# Altium PCB CAN_PDM_Pcb.PcbDoc (part 3 of 3)
Units mm, origin at the board's own origin, x right, y up, seen from the top; angles counter-clockwise.
Board outline 120 x 90 mm, 4 copper layers (Top Layer, Int1 (GND-PWR), Int2 (PWR-3V3), Bottom Layer), stack 1.51 mm thick; 313 components, 200 nets, 938 pads, 544 vias.
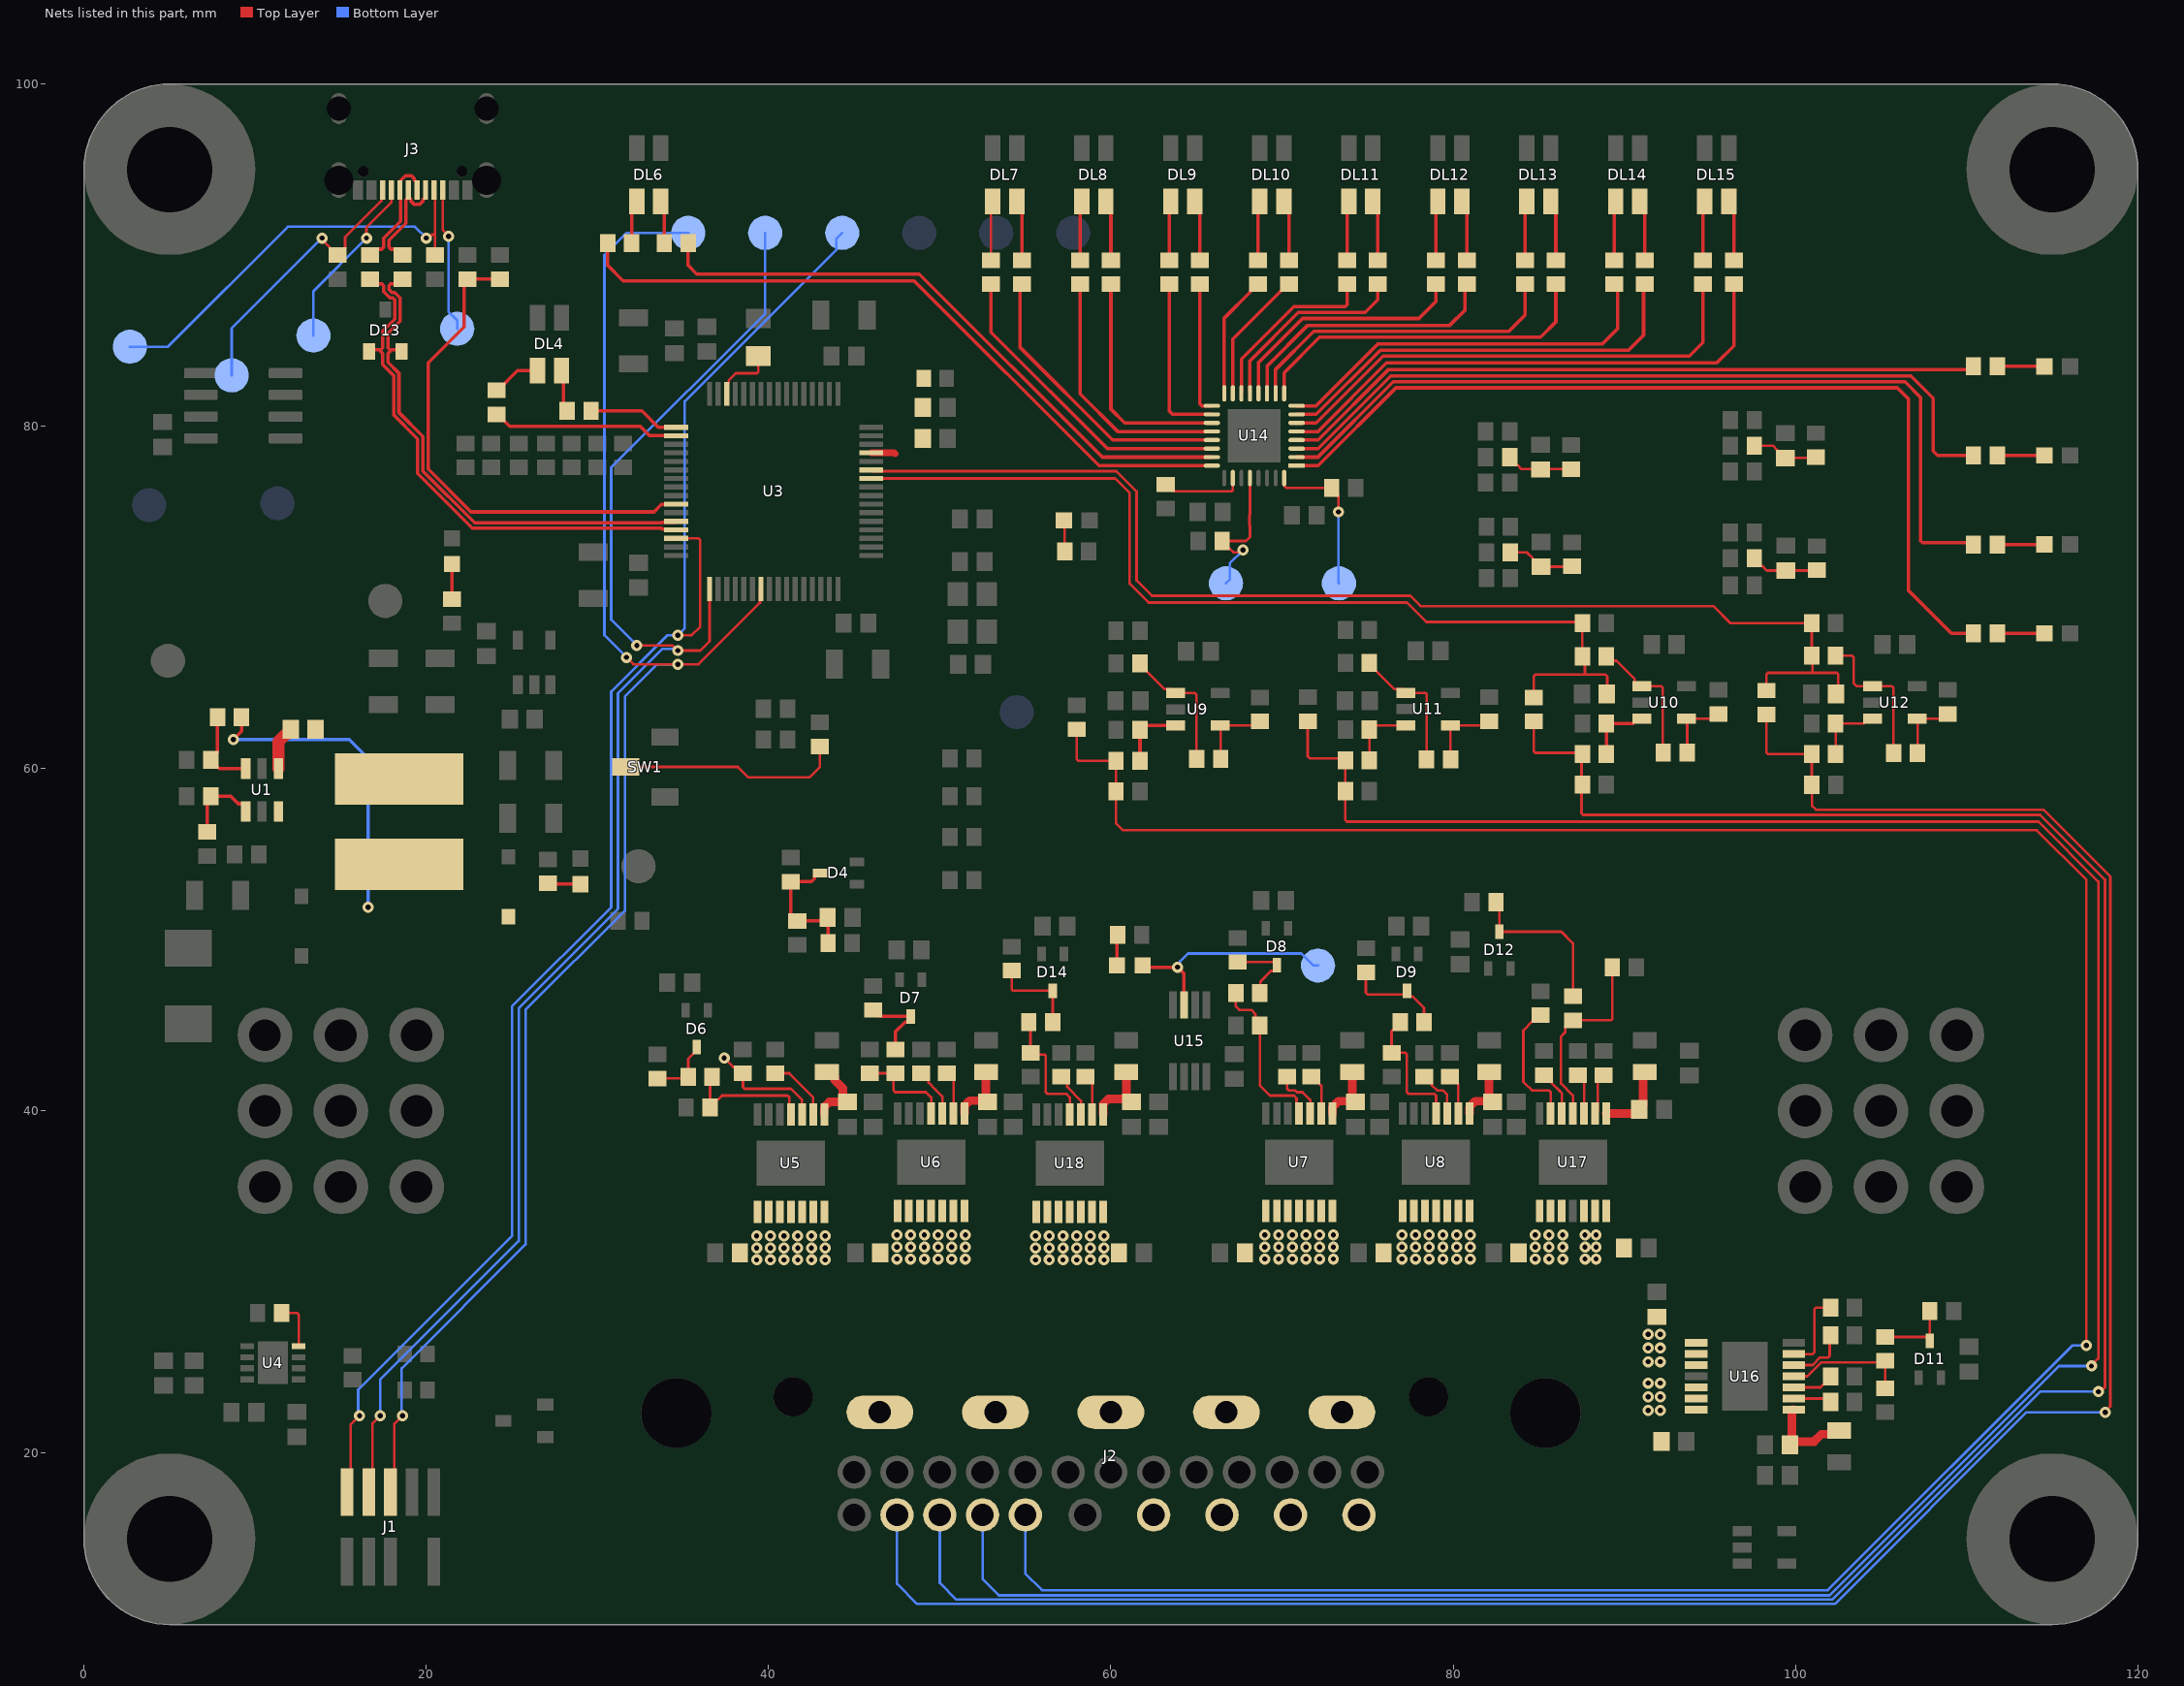
[diagram p5: the nets of this part, all layers, seen from the top]

## Via types
v1: diameter 0.65, hole 0.3, Top Layer to Bottom Layer, 543 vias
v2: diameter 0.63, hole 0.3, Top Layer to Bottom Layer, 1 vias

## Nets (pads, with @x,y where several pads share a name; then routed paths per layer and width w, separated by ;. In a path a pad name is that pad's centre, name@x,y a point inside that pad or via, vN(x,y) a via of type N, cw(c..) or ccw(c..) an arc to the next point about the centre after c; other vN are vias at no path point) (continued)
MCU_SENS3: C46.1 R51.1 R55.2 R61.2 U3.10 | length 57.9
  Top Layer w0.15: U3.10@46,76.95 60.25,76.95 61.1,76.1 61.1,70.8 62.2,69.7 77.3,69.7 78.428,68.572 87.475,68.572 R51.1@87.55,68.497 R55.2@87.55,66.561 87.7,66.411 87.7,65.5 ; R61.2@84.712,64.161 84.712,65.412 84.8,65.5 87.7,65.5 ; C46.1@88.975,64.361 89,64.385 89,65.4 88.9,65.5 87.7,65.5
MCU_SENS4: C50.1 R67.1 R71.2 R77.2 U3.11 | length 71
  Top Layer w0.15: U3.11@46,77.45 46.075,77.375 60.325,77.375 61.5,76.2 61.5,71 62.4,70.1 77.5,70.1 78.1,69.5 95.2,69.5 96.2,68.5 R67.1@100.95,68.5 R71.2@100.95,66.6 101,66.55 101,65.6 ; R77.2@98.312,64.561 98.312,65.512 98.4,65.6 101,65.6 ; C50.1@102.375,64.361 102.5,64.486 102.5,65.512 102.412,65.6 101,65.6
MCU_SWCLK: J1.4 TP3.1 U3.49 | length 93.4
  Top Layer w0.15: J1.4@16.63,17.735 16.857,17.962 16.857,21.757 v1(17.3,22.2) ; v1(32.3,67.2) 34.362,67.2 34.662,66.9 v1(34.7,66.9) 36,66.9 36.55,67.45 U3.49@36.55,70.5
  Bottom Layer w0.15: v1(17.3,22.2) 17.3,24.3 25.4,32.4 25.4,46 31.2,51.8 31.2,64.4 33.8,67 34.362,67 34.366,66.996 34.604,66.996 v1(34.7,66.9) ; v1(32.3,67.2) 30.8,68.7 30.8,77.593 39.8,86.593 TP3.1@39.8,91.3
MCU_SWDIO: J1.2 TP2.1 U3.46 | length 94
  Top Layer w0.15: J1.2@15.36,17.735 15.587,17.962 15.587,21.687 v1(16.1,22.2) ; U3.46@34.6,73.45 35.912,73.45 36,73.362 36,68.3 35.5,67.8 v1(34.7,67.8)
  Bottom Layer w0.15: v1(16.1,22.2) 16.02,22.28 16.02,23.72 25,32.7 25,46.1 30.8,51.9 30.8,64.5 34.1,67.8 v1(34.7,67.8) 35.1,68.2 35.1,81.454 43.946,90.3 43.946,90.946 TP2.1@44.3,91.3
MCU_SWO: J1.6 TP4.1 U3.55 | length 95.8
  Top Layer w0.15: J1.6@17.9,17.735 18.127,17.962 18.127,21.727 v1(18.6,22.2) ; v1(31.7,66.5) 32.1,66.1 v1(34.7,66.1) 35.9,66.1 39.491,69.691 39.491,70.441 U3.55@39.55,70.5
  Bottom Layer w0.15: v1(18.6,22.2) 18.56,22.24 18.56,24.96 25.8,32.2 25.8,45.9 31.6,51.7 31.6,64.2 33.5,66.1 v1(34.7,66.1) ; v1(31.7,66.5) 30.4,67.8 30.4,90 31.7,91.3 TP4.1@35.3,91.3
MCU_USB_VBUS: R148.1 R149.2 U3.42 | length 29.7
  Top Layer w0.2: R149.2@24.3,88.6 R148.1@22.4,88.6 22.2,88.4 22.2,85.8 20.1,83.7 20.1,77.5 22.6,75 33.3,75 33.738,75.438 34.588,75.438 U3.42@34.6,75.45
MCU_USBD_N: D13.2 R147.1 U3.44 | length 30.1
  Top Layer w0.2: 17.872,84.375 17.755,84.258 17.755,83.741 18.395,83.101 18.395,80.805 19.8,79.4 19.8,77.376 22.821,74.355 33.731,74.355 33.776,74.4 34.55,74.4 U3.44@34.6,74.45 ; D13.2@18.55,84.375 18.461,84.464 17.872,84.464 17.755,84.581 17.755,85.434 18.46,86.139 18.46,87.511 18.161,87.81 17.991,87.81 17.805,87.996 17.805,88.22 17.922,88.337 18.337,88.337 R147.1@18.6,88.6
MCU_USBD_P: D13.1 R146.1 U3.45 | length 30.6
  Top Layer w0.2: D13.1@16.65,84.375 16.739,84.464 17.328,84.464 17.445,84.581 17.445,85.562 18.15,86.267 18.15,87.383 18.033,87.5 17.862,87.5 17.495,87.867 17.495,88.22 17.378,88.337 16.963,88.337 R146.1@16.7,88.6 ; 17.328,84.375 17.445,84.258 17.445,83.613 18.085,82.973 18.085,80.677 19.49,79.272 19.49,77.247 22.692,74.045 33.731,74.045 33.776,74 34.55,74 U3.45@34.6,73.95
NetC2_1: C2.1 U1.1 | length 2.6
  Top Layer w0.7: U1.1@11.35,60 11.35,61.575 11.775,62 11.85,62 12.075,62.225 C2.1@12.075,62.3
NetC2_2: C2.2 L1.1 U1.6
NetC22_1: C22.1 U3.30 | length 3.7
  Top Layer w0.15: U3.30@37.55,81.9 37.55,82.45 37.675,82.575 37.675,82.693 38.082,83.1 39.312,83.1 39.4,83.188 C22.1@39.4,84.1
NetC24_1: C24.1 D4.C R10.1 R11.1 R12.2 | length 7.8
  Top Layer w0.2: D4.C@43,53.9 42.825,53.9 42.675,53.75 42.675,53.575 42.5,53.4 R11.1@41.3,53.4 41.3,51.45 41.65,51.1 R10.1@41.675,51.1 43.25,51.1 C24.1@43.45,51.3 43.475,51.275 R12.2@43.475,49.8
NetC29_2: C29.2 R20.1 U5.1 | length 4.3
  Top Layer w0.5: U5.1@43.25,39.8 43.25,40.232 43.543,40.525 C29.2@44.557,40.525 ; R20.1@43.4,42.275 43.625,42.275 43.85,42.05 43.85,41.825 44.332,41.343 44.332,40.75 C29.2@44.557,40.525 ; C29.2@44.6,40.525 C29.2@44.557,40.525
NetC33_2: C33.2 R26.1 U6.1 | length 3.6
  Top Layer w0.5: U6.1@51.45,39.85 51.45,40.307 51.743,40.6 C33.2@52.725,40.6 ; R26.1@52.7,42.275 52.7,40.625 C33.2@52.725,40.6 ; C33.2@52.8,40.525 C33.2@52.725,40.6
NetC37_2: C37.2 R34.1 U7.1 | length 3.7
  Top Layer w0.5: U7.1@72.95,39.85 72.95,40.23 73.293,40.573 C37.2@74.252,40.573 ; R34.1@74.1,42.275 74.1,40.725 C37.2@74.252,40.573 ; C37.2@74.3,40.525 C37.2@74.252,40.573
NetC41_2: C41.2 R40.1 U8.1 | length 3.7
  Top Layer w0.5: U8.1@80.95,39.85 80.95,40.23 81.293,40.573 C41.2@82.252,40.573 ; R40.1@82.1,42.275 82.1,40.725 C41.2@82.252,40.573 ; C41.2@82.3,40.525 C41.2@82.252,40.573
NetC53_1: C53.1 R80.2 R81.1 | length 3.9
  Top Layer w0.15: R81.1@83.3,78.2 83.3,78.125 83.675,77.75 83.75,77.75 84,77.5 R80.2@86.9,77.5
NetC54_1: C54.1 R82.2 R83.1 | length 4
  Top Layer w0.15: R83.1@97.6,78.875 98.675,78.875 98.925,78.625 98.925,78.55 99.325,78.15 C54.1@99.4,78.15 101.15,78.15 R82.2@101.2,78.2
NetC55_1: C55.1 R88.2 R89.1 | length 4
  Top Layer w0.15: R89.1@83.339,72.625 84.314,72.625 84.664,72.275 84.664,72.2 85.064,71.8 C55.1@85.139,71.8 86.914,71.8 R88.2@86.939,71.825
NetC56_1: C56.1 R90.2 R91.1 | length 4
  Top Layer w0.15: R91.1@97.6,72.3 97.6,72.225 97.975,71.85 98.05,71.85 98.325,71.575 C56.1@99.439,71.575 101.214,71.575 R90.2@101.239,71.6
NetC61_2: C61.2 R105.1 U16.1 | length 5.2
  Top Layer w0.5: C61.2@99.675,20.5 99.675,20.575 C61.2@99.788,20.687 ; U16.1@99.9,22.55 99.813,22.55 99.788,22.525 C61.2@99.788,20.687 ; R105.1@102.55,21.325 102.345,21.12 101.52,21.12 101.088,20.687 C61.2@99.788,20.687
NetC66_2: C66.2 R116.1 U17.1 | length 4
  Top Layer w0.5: U17.1@88.95,39.85 C66.2@90.65,39.85 ; C66.2@90.875,40.1 91.1,40.325 91.1,42.175 R116.1@91.2,42.275
NetC71_2: C71.2 R153.1 U18.1 | length 4
  Top Layer w0.5: U18.1@59.55,39.8 59.55,40.407 59.843,40.7 C71.2@60.95,40.7 ; R153.1@60.9,42.275 60.9,40.75 C71.2@60.95,40.7 ; C71.2@61.2,40.525 61.125,40.525 C71.2@60.95,40.7
NetD2_A: D2.A L1.2 R1.2 | length 18.5
  Top Layer w0.2: v1(8.725,61.706) 9.2,62.181 R1.2@9.2,63
  Bottom Layer w0.2: v1(8.725,61.706) 8.732,61.698 15.502,61.698 16.6,60.6 v1(16.6,51.9)
NetD6_C: D6.C R23.2 R24.1 | length 3.8
  Top Layer w0.15: R23.2@33.5,41.9 35.2,41.9 R24.1@35.3,42 35.3,43.05 35.8,43.55 D6.C@35.8,43.725
NetD7_C: D7.C R29.2 R30.1 | length 4.8
  Top Layer w0.2: R29.2@46.1,45.9 46.45,45.55 46.617,45.55 46.642,45.525 D7.C@48.3,45.525 48.3,45.35 48.15,45.2 47.975,45.2 47.4,44.625 R30.1@47.4,43.6
NetD8_C: D8.C R37.2 R38.1 | length 4.5
  Top Layer w0.15: R37.2@67.4,48.7 69.525,48.7 D8.C@69.7,48.525 69.7,48.353 69.525,48.178 69.353,48.178 68.737,47.562 68.737,46.937 R38.1@68.7,46.9
NetD9_C: D9.C R43.2 R44.1 | length 6
  Top Layer w0.15: R43.2@74.9,48.1 74.9,46.917 75.017,46.8 77.15,46.8 D9.C@77.3,46.95 ; D9.C@77.3,47.025 D9.C@77.3,46.95 ; R44.1@78.3,45.2 78.3,46.025 77.625,46.7 77.45,46.7 77.3,46.85 D9.C@77.3,46.95
NetD11_C: D11.C R110.2 R111.1 | length 4.4
  Top Layer w0.15: R111.1@105.25,26.8 107.675,26.8 D11.C@107.85,26.625 ; D11.C@107.85,26.575 D11.C@107.85,26.625 ; R110.2@107.85,28.3 D11.C@107.85,26.625
NetD12_C: D12.C R121.2 R122.1 | length 9.5
  Top Layer w0.15: R121.2@82.5,52.2 82.7,52 D12.C@82.7,50.475 86.325,50.475 87,49.8 R122.1@87,46.7
NetD14_C: D14.C R156.2 R157.1 | length 5.3
  Top Layer w0.15: R156.2@54.2,48.2 54.2,47.113 54.288,47.025 D14.C@56.6,47.025 R157.1@56.6,45.2
NetDL1_A: DL1.A R2.1 | length 1.9
  Top Layer w0.2: R2.1@27.1,53.3 27.15,53.25 DL1.A@29,53.25
NetDL2_A: DL2.A R6.1 | length 2.1
  Top Layer w0.2: R6.1@21.5,69.9 DL2.A@21.5,71.95
NetDL3_A: DL3.A R8.1 | length 1.8
  Top Layer w0.15: DL3.A@57.25,74.5 57.3,74.45 R8.1@57.3,72.7
NetDL4_A1: DL4.A1 R17.1 | length 1.9
  Top Layer w0.2: DL4.A1@27.9,83.25 28,83.15 R17.1@28,81.4
NetDL4_A2: DL4.A2 R16.1 | length 2.9
  Top Layer w0.2: R16.1@24.1,82.1 24.175,82.1 25.325,83.25 DL4.A2@26.5,83.25
NetDL5_A: DL5.A R99.1 | length 1.8
  Top Layer w0.2: DL5.A@60.35,48.5 60.35,50.25 R99.1@60.4,50.3
NetDL5_C: DL5.C TP16.1 U15.3 | length 13.4
  Top Layer w0.2: DL5.C@61.85,48.5 61.95,48.4 v1(63.9,48.4) 64.275,48.025 U15.3@64.275,46.2
  Bottom Layer w0.15: v1(63.9,48.4) 63.9,48.522 64.042,48.664 64.042,48.742 64.5,49.2 71.127,49.2 71.827,48.5 TP16.1@72.1,48.5
NetDL6_A1: DL6.A1 R101.1 | length 2.5
  Top Layer w0.2: DL6.A1@33.7,93.15 33.9,92.95 R101.1@33.9,90.7
NetDL6_A2: DL6.A2 R100.1 | length 2.6
  Top Layer w0.2: R100.1@32,90.7 32,92.85 DL6.A2@32.3,93.15
NetDL7_A1: DL7.A1 R125.1 | length 3.6
  Top Layer w0.2: DL7.A1@54.5,93.15 54.8,92.85 R125.1@54.8,89.7
NetDL7_A2: DL7.A2 R124.1 | length 3.5
  Top Layer w0.15: R124.1@53,89.7 53,93.05 DL7.A2@53.1,93.15
NetDL8_A1: DL8.A1 R127.1 | length 3.6
  Top Layer w0.2: DL8.A1@59.7,93.15 60,92.85 R127.1@60,89.7
NetDL8_A2: DL8.A2 R126.1 | length 3.5
  Top Layer w0.2: R126.1@58.2,89.7 58.2,93.05 DL8.A2@58.3,93.15
NetDL9_A1: DL9.A1 R129.1 | length 3.6
  Top Layer w0.2: DL9.A1@64.9,93.15 65.2,92.85 R129.1@65.2,89.7
NetDL9_A2: DL9.A2 R128.1 | length 3.5
  Top Layer w0.2: R128.1@63.4,89.7 63.4,93.05 DL9.A2@63.5,93.15
NetDL10_A1: DL10.A1 R131.1 | length 3.6
  Top Layer w0.2: DL10.A1@70.1,93.15 70.4,92.85 R131.1@70.4,89.7
NetDL10_A2: DL10.A2 R130.1 | length 3.5
  Top Layer w0.2: R130.1@68.6,89.7 68.6,93.05 DL10.A2@68.7,93.15
NetDL11_A1: DL11.A1 R133.1 | length 3.6
  Top Layer w0.2: DL11.A1@75.3,93.15 75.6,92.85 R133.1@75.6,89.7
NetDL11_A2: DL11.A2 R132.1 | length 3.5
  Top Layer w0.2: R132.1@73.8,89.7 73.8,93.05 DL11.A2@73.9,93.15
NetDL12_A1: DL12.A1 R135.1 | length 3.6
  Top Layer w0.2: DL12.A1@80.5,93.15 80.8,92.85 R135.1@80.8,89.7
NetDL12_A2: DL12.A2 R134.1 | length 3.5
  Top Layer w0.2: R134.1@79,89.7 79,93.05 DL12.A2@79.1,93.15
NetDL13_A1: DL13.A1 R137.1 | length 3.6
  Top Layer w0.2: DL13.A1@85.7,93.15 86,92.85 R137.1@86,89.7
NetDL13_A2: DL13.A2 R136.1 | length 3.5
  Top Layer w0.2: R136.1@84.2,89.7 84.2,93.05 DL13.A2@84.3,93.15
NetDL14_A1: DL14.A1 R139.1 | length 3.6
  Top Layer w0.2: DL14.A1@90.9,93.15 91.2,92.85 R139.1@91.2,89.7
NetDL14_A2: DL14.A2 R138.1 | length 3.5
  Top Layer w0.2: R138.1@89.4,89.7 89.4,93.05 DL14.A2@89.5,93.15
NetDL15_A1: DL15.A1 R141.1 | length 3.6
  Top Layer w0.2: DL15.A1@96.1,93.15 96.4,92.85 R141.1@96.4,89.7
NetDL15_A2: DL15.A2 R140.1 | length 3.5
  Top Layer w0.2: R140.1@94.6,89.7 94.6,93.05 DL15.A2@94.7,93.15
NetDL16_A: DL16.A R142.1 | length 2.8
  Top Layer w0.2: R142.1@111.8,83.3 112,83.5 DL16.A@114.55,83.5
NetDL17_A: DL17.A R143.1 | length 2.8
  Top Layer w0.2: R143.1@111.8,78.3 DL17.A@114.55,78.3
NetDL18_A: DL18.A R144.1 | length 2.8
  Top Layer w0.2: R144.1@111.8,73.1 DL18.A@114.55,73.1
NetDL19_A: DL19.A R145.1 | length 2.8
  Top Layer w0.2: R145.1@111.8,67.9 DL19.A@114.55,67.9
NetJ3_A5: J3.A5 R150.2 TP21.1 | length 24.9
  Top Layer w0.15: v1(20,91) 20.135,91 20.335,91.2 20.5,91.2 ; J3.A5@20.45,93.81 20.5,93.76 20.5,91.2 ; R150.2@20.5,90 20.5,91.2
  Bottom Layer w0.15: TP21.1@2.675,84.65 4.9,84.65 11.91,91.66 19.34,91.66 v1(20,91)
NetJ3_A8: J3.A8 TP20.1 | length 10.4
  Top Layer w0.15: v1(16.5,91) 16.5,91.625 17.95,93.075 J3.A8@17.95,93.81
  Bottom Layer w0.15: TP20.1@13.4,85.3 13.4,87.9 v1(16.5,91)
NetJ3_B5: J3.B5 R151.2 TP22.1 | length 16.6
  Top Layer w0.15: v1(13.9,91) 13.9,90.888 13.988,90.8 14,90.8 14.35,90.45 14.35,90.375 14.725,90 R151.2@14.8,90 14.875,90 15.25,90.375 15.25,91.05 17.375,93.175 17.375,93.735 J3.B5@17.45,93.81
  Bottom Layer w0.15: TP22.1@8.625,82.975 8.625,85.725 v1(13.9,91)
NetJ3_B8: J3.B8 TP19.1 | length 8.5
  Top Layer w0.15: J3.B8@20.95,93.81 20.95,91.495 21.293,91.152 v1(21.293,91.093)
  Bottom Layer w0.15: v1(21.293,91.093) 21.293,86.708 21.8,86.201 TP19.1@21.8,85.7
NetR1_1: R1.1 R5.2 U1.3 | length 4.5
  Top Layer w0.2: R1.1@7.8,62.5 7.8,60.975 7.4,60.575 R5.2@7.4,60.5 7.4,60.425 7.75,60.075 7.825,60.075 7.9,60 U1.3@9.45,60
NetR3_2: R3.2 R4.2 U1.4 | length 4.8
  Top Layer w0.2: R3.2@7.2,56.3 7.2,58.2 R4.2@7.4,58.4 8.55,58.4 9,57.95 9.275,57.95 9.45,57.775 U1.4@9.45,57.5
NetR9_1: R9.1 SW1.2 | length 13
  Top Layer w0.15: SW1.2@31.65,60.1 38.2,60.1 38.8,59.5 42.4,59.5 43,60.1 R9.1@43,61.3
NetR15_2: R15.2 U4.8 | length 2.9
  Top Layer w0.15: R15.2@11.538,28.19 12.45,28.19 12.538,28.102 U4.8@12.538,26.265
NetR21_1: R21.1 U5.3 | length 6.9
  Top Layer w0.15: v1(37.4,43.1) 37.925,42.575 38.125,42.575 R21.1@38.5,42.2 38.5,41.388 38.588,41.3 41.3,41.3 41.95,40.65 U5.3@41.95,39.8
NetR22_2: R22.2 U5.2 | length 3.8
  Top Layer w0.15: R22.2@40.4,42.2 41.2,42.2 42.6,40.8 U5.2@42.6,39.8
NetR24_2: R24.2 R25.2 U5.4 | length 7.9
  Top Layer w0.15: R24.2@36.7,42 36.575,41.875 R25.2@36.575,40.2 36.575,40.275 36.95,40.65 37.025,40.65 37.275,40.9 41.112,40.9 41.2,40.812 41.2,39.9 U5.4@41.3,39.8
NetR27_1: R27.1 U6.3 | length 2.9
  Top Layer w0.15: R27.1@48.9,42.2 48.975,42.2 49.347,41.828 49.347,41.653 49.748,41.252 50.15,40.85 U6.3@50.15,39.85
NetR28_2: R28.2 U6.2 | length 2.5
  Top Layer w0.15: R28.2@50.4,42.2 50.425,42.2 50.8,41.825 U6.2@50.8,39.85
NetR30_2: R30.2 R31.2 U6.4 | length 5.9
  Top Layer w0.15: R31.2@45.9,42.2 R30.2@47.4,42.2 47.3,42.1 47.3,41.188 47.388,41.1 49.193,41.1 49.5,40.793 U6.4@49.5,39.85
NetR35_1: R35.1 U7.3 | length 3.1
  Top Layer w0.15: R35.1@70.3,42 70.3,41.288 70.388,41.2 70.754,41.2 70.854,41.1 71.2,41.1 71.65,40.65 U7.3@71.65,39.85
NetR36_2: R36.2 U7.2 | length 2.4
  Top Layer w0.15: R36.2@71.7,42 71.775,42 72.3,41.475 U7.2@72.3,39.85
NetR38_2: R38.2 R39.2 U7.4 | length 9.8
  Top Layer w0.15: R38.2@67.3,46.9 67.3,46.1 67.5,45.9 68.2,45.9 68.438,45.662 68.438,45.262 R39.2@68.7,45 68.7,41.5 69.3,40.9 70.693,40.9 70.85,40.743 70.85,40 U7.4@71,39.85
NetR41_1: R41.1 U8.3 | length 3
  Top Layer w0.15: R41.1@78.3,42 78.375,42 78.75,41.625 78.75,41.504 79.054,41.2 79.4,41.2 79.65,40.95 U8.3@79.65,39.85
NetR42_2: R42.2 U8.2 | length 2.4
  Top Layer w0.15: R42.2@79.8,42 79.875,42 80.3,41.575 U8.2@80.3,39.85
NetR44_2: R44.2 R45.2 U8.4 | length 8
  Top Layer w0.15: R44.2@76.9,45.2 76.9,45.125 76.525,44.75 76.488,44.75 76.4,44.662 R45.2@76.4,43.4 77.212,43.4 77.3,43.312 77.3,41.088 77.388,41 78.9,41 79,40.9 U8.4@79,39.85
NetR46_1: R46.1 R54.1 U9.1 | length 7.9
  Top Layer w0.15: R54.1@61.7,66.161 61.7,66.086 63.146,64.64 63.553,64.64 U9.1@63.778,64.415 64.912,64.415 65,64.327 65,60.573 R46.1@65.012,60.561
NetR46_2: R46.2 R52.1 U9.4 | length 4.4
  Top Layer w0.15: R46.2@66.412,60.561 66.412,62.48 U9.4@66.378,62.515 68.466,62.515 R52.1@68.712,62.761
NetR47_1: R47.1 R55.1 U10.1 | length 8
  Top Layer w0.15: R55.1@88.95,66.561 89.203,66.308 89.537,66.308 90.596,65.249 90.596,65.04 90.821,64.815 U10.1@91.03,64.815 92.164,64.815 92.252,64.727 92.252,60.973 R47.1@92.264,60.961
NetR47_2: R47.2 R53.1 U10.4 | length 4
  Top Layer w0.15: R47.2@93.675,60.927 93.675,62.87 U10.4@93.63,62.915 95.215,62.915 R53.1@95.5,63.2
NetR56_2: R56.2 R58.2 U9.3 | length 4
  Top Layer w0.2: R56.2@61.7,60.461 R58.2@61.7,62.261 61.954,62.515 U9.3@63.778,62.515
NetR57_2: R57.2 R59.2 U10.3 | length 4
  Top Layer w0.2: R57.2@88.95,60.852 R59.2@88.95,62.639 90.505,62.639 90.78,62.915 U10.3@91.03,62.915
NetR62_1: R62.1 R70.1 U11.1 | length 7.9
  Top Layer w0.15: R70.1@75.1,66.175 75.1,66.1 76.546,64.654 77.011,64.654 U11.1@77.236,64.429 78.37,64.429 78.458,64.341 78.458,60.587 R62.1@78.47,60.575
NetR62_2: R62.2 R68.1 U11.4 | length 4.4
  Top Layer w0.15: R62.2@79.848,60.536 79.848,62.517 U11.4@79.836,62.529 81.847,62.529 R68.1@82.093,62.775
NetR63_1: R63.1 R71.1 U12.1 | length 8.8
  Top Layer w0.15: R71.1@102.35,66.6 103.312,66.6 103.4,66.512 103.4,65 103.589,64.811 U12.1@104.512,64.811 105.646,64.811 105.734,64.723 105.734,60.969 R63.1@105.746,60.957
NetR63_2: R63.2 R69.1 U12.4 | length 3.9
  Top Layer w0.15: R63.2@107.135,60.903 107.135,62.888 U12.4@107.112,62.911 108.611,62.911 R69.1@108.9,63.2
NetR72_2: R72.2 R74.2 U11.3 | length 4
  Top Layer w0.15: R72.2@75.1,60.497 R74.2@75.1,62.284 75.345,62.529 U11.3@77.236,62.529
NetR73_2: R73.2 R75.2 U12.3 | length 4.1
  Top Layer w0.15: R73.2@102.35,60.857 R75.2@102.35,62.639 103.991,62.639 104.262,62.911 U12.3@104.512,62.911
NetR96_1: R96.1 TP15.1 U14.32 | length 9
  Top Layer w0.15: U14.32@70.126,76.974 70.143,76.957 70.143,76.515 70.258,76.4 R96.1@72.9,76.4 73.275,76.025 73.275,75.887 73.3,75.862 v1(73.3,75)
  Bottom Layer w0.15: v1(73.3,75) 73.3,70.851 TP15.1@73.326,70.826
NetR97_1: R97.1 TP14.1 U14.28 | length 9.2
  Top Layer w0.15: v1(67.725,72.775) 67.59,72.775 67.454,72.639 67.161,72.639 66.95,72.85 66.875,72.85 66.5,73.225 R97.1@66.5,73.3 67.9,73.3 68.126,73.526 68.126,74.167 68.1,74.193 68.1,74.832 68.126,74.858 U14.28@68.126,76.974
  Bottom Layer w0.15: TP14.1@66.726,70.826 66.963,71.063 66.963,72.013 v1(67.725,72.775)
NetR98_1: R98.1 U14.26 | length 4.8
  Top Layer w0.15: R98.1@63.2,76.6 63.575,76.225 63.713,76.225 63.738,76.2 67.038,76.2 67.126,76.288 U14.26@67.126,76.974
NetR100_2: R100.2 U14.24 | length 41.4
  Top Layer w0.2: R100.2@30.6,90.7 30.6,89.4 31.5,88.5 48.5,88.5 59.3,77.7 U14.24@65.9,77.7
NetR101_2: R101.2 U14.23 | length 36.5
  Top Layer w0.2: R101.2@35.3,90.7 35.3,89.4 35.8,88.9 48.8,88.9 59.5,78.2 U14.23@65.9,78.2
NetR106_1: R106.1 U16.3 | length 2.5
  Top Layer w0.15: U16.3@99.9,23.85 101.475,23.85 102.05,24.425 R106.1@102.05,24.5
NetR107_2: R107.2 U16.5 | length 3.6
  Top Layer w0.15: U16.5@99.9,25.15 100.996,25.15 101.446,25.6 101.912,25.6 102,25.688 102,26.85 R107.2@102.05,26.9
NetR108_2: R108.2 U16.2 | length 2.2
  Top Layer w0.15: U16.2@99.9,23.2 101.85,23.2 R108.2@102.05,23
NetR109_2: R109.2 U16.6 | length 4.7
  Top Layer w0.15: U16.6@99.9,25.8 101,25.8 101.1,25.9 101.1,28.412 101.188,28.5 R109.2@102.05,28.5
NetR111_2: R111.2 R112.2 U16.4 | length 7.3
  Top Layer w0.15: U16.4@99.9,24.5 100.7,24.5 101.5,25.3 105.15,25.3 R111.2@105.25,25.4 R112.2@105.25,23.8
NetR117_1: R117.1 U17.3 | length 2.4
  Top Layer w0.15: R117.1@87.3,42.1 87.65,41.75 87.65,41.1 U17.3@87.65,39.85
NetR118_2: R118.2 U17.5 | length 2.7
  Top Layer w0.15: R118.2@85.3,42.1 85.375,42.1 85.75,41.725 85.75,41.65 86.287,41.113 86.287,41.1 86.35,41.037 U17.5@86.35,39.85
NetR119_2: R119.2 U17.2 | length 2.5
  Top Layer w0.15: U17.2@88.3,39.85 88.45,40 88.45,41.75 R119.2@88.8,42.1
NetR120_2: R120.2 U17.6 | length 7.5
  Top Layer w0.15: R120.2@85.1,45.6 84.725,45.225 84.625,45.225 84.1,44.7 84.1,41.7 84.2,41.6 84.6,41.2 85.6,41.2 85.7,41.1 U17.6@85.7,39.85
NetR122_2: R122.2 R123.2 U17.4 | length 11.4
  Top Layer w0.15: U17.4@87,39.85 87,40.9 86.3,41.6 86.3,44.346 86.55,44.596 86.55,44.925 86.925,45.3 R122.2@87,45.3 89.212,45.3 89.3,45.388 R123.2@89.3,48.4
NetR154_1: R154.1 U18.3 | length 2.7
  Top Layer w0.15: R154.1@57.1,42 57.45,41.65 57.45,41.4 58.25,40.6 U18.3@58.25,39.8
NetR155_2: R155.2 U18.2 | length 2.4
  Top Layer w0.15: R155.2@58.5,42 58.525,42 58.9,41.625 U18.2@58.9,39.8
NetR157_2: R157.2 R158.2 U18.4 | length 7.5
  Top Layer w0.15: R157.2@55.2,45.2 55.3,45.1 R158.2@55.3,43.4 55.4,43.3 56.112,43.3 56.2,43.212 56.2,41.088 56.288,41 57.4,41 57.6,40.8 U18.4@57.6,39.8
OUT_H1: C31.1 J2.1 U5.8 U5.9 U5.10 U5.11 U5.12 U5.13 U5.14
  other v1: 39.3,31.3 40.1,31.3 40.9,31.3 41.7,31.3 42.5,31.3 43.3,31.3 39.3,32 40.1,32 40.9,32 41.7,32 42.5,32 43.3,32 39.3,32.7 40.1,32.7 40.9,32.7 41.7,32.7 42.5,32.7 43.3,32.7
OUT_H2: C35.1 J2.2 U6.8 U6.9 U6.10 U6.11 U6.12 U6.13 U6.14
  other v1: 47.5,31.35 48.3,31.35 49.1,31.35 49.9,31.35 50.7,31.35 51.5,31.35 47.5,32.05 48.3,32.05 49.1,32.05 49.9,32.05 50.7,32.05 51.5,32.05 47.5,32.75 48.3,32.75 49.1,32.75 49.9,32.75 50.7,32.75 51.5,32.75
OUT_H3: C73.1 J2.3 U18.8 U18.9 U18.10 U18.11 U18.12 U18.13 U18.14
  other v1: 55.6,31.3 56.4,31.3 57.2,31.3 58,31.3 58.8,31.3 59.6,31.3 55.6,32 56.4,32 57.2,32 58,32 58.8,32 59.6,32 55.6,32.7 56.4,32.7 57.2,32.7 58,32.7 58.8,32.7 59.6,32.7
OUT_L1: C63.1 J2.25 U16.12 U16.13 U16.14
  other v1: 91.4,22.5 92.1,22.5 91.4,23.3 92.1,23.3 91.4,24.1 92.1,24.1
OUT_L2: C64.1 J2.26 U16.8 U16.9 U16.10
  other v1: 91.4,25.35 92.1,25.35 91.4,26.15 92.1,26.15 91.4,26.95 92.1,26.95
OUT_L3: C68.1 J2.27 U17.12 U17.13 U17.14
  other v1: 87.7,31.35 88.35,31.35 87.7,32.05 88.35,32.05 87.7,32.75 88.35,32.75
OUT_L4: C69.1 J2.28 U17.8 U17.9 U17.10
  other v1: 84.8,31.35 85.6,31.35 86.4,31.35 84.8,32.05 85.6,32.05 86.4,32.05 84.8,32.75 85.6,32.75 86.4,32.75
OUT_M1: C39.1 J2.4 U7.8 U7.9 U7.10 U7.11 U7.12 U7.13 U7.14
  other v1: 69,31.35 69.8,31.35 70.6,31.35 71.4,31.35 72.2,31.35 73,31.35 69,32.05 69.8,32.05 70.6,32.05 71.4,32.05 72.2,32.05 73,32.05 69,32.75 69.8,32.75 70.6,32.75 71.4,32.75 72.2,32.75 73,32.75
OUT_M2: C43.1 J2.5 U8.8 U8.9 U8.10 U8.11 U8.12 U8.13 U8.14
  other v1: 77,31.35 77.8,31.35 78.6,31.35 79.4,31.35 80.2,31.35 81,31.35 77,32.05 77.8,32.05 78.6,32.05 79.4,32.05 80.2,32.05 81,32.05 77,32.75 77.8,32.75 78.6,32.75 79.4,32.75 80.2,32.75 81,32.75
S1_IN: J2.23 R48.1 R56.1 R60.1 | length 164.8
  Top Layer w0.15: R60.1@58,62.3 58,60.548 58.088,60.461 R56.1@60.3,60.461 R48.1@60.3,58.661 60.3,56.8 60.7,56.4 114.1,56.4 117,53.5 v1(117,26.3)
  Bottom Layer w0.15: J2.23@55,16.4 55,12.975 55.975,12 101.9,12 116.2,26.3 v1(117,26.3)
S2_IN: J2.22 R64.1 R72.1 R76.1 | length 156.3
  Top Layer w0.15: R76.1@71.5,62.775 71.5,60.717 71.617,60.6 73.597,60.6 R72.1@73.7,60.497 R64.1@73.7,58.687 73.7,57 73.8,56.9 114.2,56.9 117.7,53.4 117.7,25.538 117.3,25.138 v1(117.3,25.1)
  Bottom Layer w0.15: J2.22@52.5,16.4 52.5,12.65 53.45,11.7 102,11.7 115.4,25.1 v1(117.3,25.1)
S3_IN: J2.21 R50.1 R57.1 R61.1 | length 147.5
  Top Layer w0.15: R61.1@84.712,62.761 84.712,61.009 84.8,60.921 87.5,60.921 R50.1@87.5,59.177 ; R50.1@87.55,59.061 87.5,59.01 87.5,57.388 87.588,57.3 114.3,57.3 118.089,53.511 118.089,23.865 117.913,23.689 117.789,23.689 v1(117.7,23.6)
  Bottom Layer w0.15: J2.21@50,16.4 50,12.425 50.975,11.45 102.15,11.45 114.3,23.6 v1(117.7,23.6)
S4_IN: J2.20 R66.1 R73.1 R77.1 | length 138.3
  Top Layer w0.15: R77.1@98.312,63.161 98.3,63.148 98.3,60.945 98.388,60.857 R73.1@100.95,60.857 100.95,59.062 R66.1@100.958,59.054 100.958,57.842 101.2,57.6 114.5,57.6 116.9,55.2 118.4,53.7 118.4,22.738 118.1,22.438 v1(118.1,22.4)
  Bottom Layer w0.15: J2.20@47.5,16.4 47.5,12.375 48.675,11.2 102.3,11.2 113.5,22.4 v1(118.1,22.4)
STATUS_CAN_RX: R16.2 U3.34 | length 11
  Top Layer w0.2: R16.2@24.1,80.7 24.175,80.7 24.875,80 32.5,80 33.05,79.45 U3.34@34.6,79.45
STATUS_CAN_TX: R17.2 U3.33 | length 5.4
  Top Layer w0.2: R17.2@29.625,80.9 32.6,80.9 33.55,79.95 U3.33@34.6,79.95
STATUS_IN_D1: R142.2 U14.4 | length 41.2
  Top Layer w0.2: U14.4@70.851,79.2 72.1,79.2 76.2,83.3 R142.2@110.4,83.3
STATUS_IN_D2: R143.2 U14.3 | length 45.1
  Top Layer w0.2: U14.3@70.851,78.7 72.1,78.7 76.35,82.95 106.75,82.95 108.055,81.645 108.055,78.545 108.3,78.3 R143.2@110.4,78.3
STATUS_IN_D3: R144.2 U14.2 | length 50.2
  Top Layer w0.2: U14.2@70.851,78.2 72.095,78.2 76.495,82.6 106.4,82.6 107.3,81.7 107.3,73.317 107.417,73.2 110.3,73.2 R144.2@110.4,73.1
STATUS_IN_D4: R145.2 U14.1 | length 53.9
  Top Layer w0.2: U14.1@70.851,77.7 72.1,77.7 76.65,82.25 105.95,82.25 106.6,81.6 106.6,70.412 109.112,67.9 R145.2@110.4,67.9
STATUS_OUT_H1_ERR: R125.2 U14.21 | length 17.2
  Top Layer w0.2: R125.2@54.8,88.3 54.7,88.2 54.7,84.6 60.1,79.2 U14.21@65.9,79.2
STATUS_OUT_H1_OK: R124.2 U14.22 | length 18.5
  Top Layer w0.2: R124.2@53,88.3 53,85.5 59.8,78.7 U14.22@65.9,78.7
STATUS_OUT_H2_ERR: R127.2 U14.19 | length 13.5
  Top Layer w0.2: R127.2@60,88.3 60,81 60.8,80.2 U14.19@65.9,80.2
STATUS_OUT_H2_OK: R126.2 U14.20 | length 15
  Top Layer w0.2: R126.2@58.2,88.3 58.2,81.9 60.4,79.7 U14.20@65.9,79.7
STATUS_OUT_H3_ERR: R129.2 U14.17 | length 7.7
  Top Layer w0.2: R129.2@65.2,88.3 65.2,81.317 65.317,81.2 U14.17@65.9,81.2
STATUS_OUT_H3_OK: R128.2 U14.18 | length 10
  Top Layer w0.2: R128.2@63.4,88.3 63.4,80.9 63.6,80.7 U14.18@65.9,80.7
STATUS_OUT_L1_ERR: R135.2 U14.11 | length 16.1
  Top Layer w0.2: U14.11@69.126,81.926 69.126,83.526 71.5,85.9 79.8,85.9 80.7,86.8 80.7,88.2 R135.2@80.8,88.3
STATUS_OUT_L1_OK: R134.2 U14.12 | length 14.7
  Top Layer w0.2: U14.12@68.626,81.926 68.626,83.726 71.2,86.3 78,86.3 79,87.3 R134.2@79,88.3
STATUS_OUT_L2_ERR: R137.2 U14.9 | length 20.5
  Top Layer w0.2: U14.9@70.126,81.926 70.126,83.126 72.2,85.2 85.1,85.2 86,86.1 R137.2@86,88.3
STATUS_OUT_L2_OK: R136.2 U14.10 | length 19.1
  Top Layer w0.2: U14.10@69.626,81.926 69.626,83.326 71.85,85.55 83.25,85.55 84.2,86.5 R136.2@84.2,88.3
STATUS_OUT_L3_ERR: R139.2 U14.7 | length 25.2
  Top Layer w0.2: U14.7@70.851,80.7 72,80.7 75.75,84.45 90.25,84.45 91.125,85.325 91.125,88.225 R139.2@91.2,88.3
STATUS_OUT_L3_OK: R138.2 U14.8 | length 23.3
  Top Layer w0.2: U14.8@70.851,81.2 72,81.2 75.6,84.8 88.7,84.8 89.6,85.7 89.6,88.1 R138.2@89.4,88.3
STATUS_OUT_L4_ERR: R141.2 U14.5 | length 31.2
  Top Layer w0.2: U14.5@70.851,79.7 72.1,79.7 76.1,83.7 95.4,83.7 96.4,84.7 R141.2@96.4,88.3
STATUS_OUT_L4_OK: R140.2 U14.6 | length 29.1
  Top Layer w0.2: U14.6@70.851,80.2 72,80.2 75.9,84.1 93.8,84.1 94.6,84.9 R140.2@94.6,88.3
STATUS_OUT_M1_ERR: R131.2 U14.15 | length 7.8
  Top Layer w0.2: U14.15@67.126,81.926 67.126,85.101 70.325,88.3 R131.2@70.4,88.3
STATUS_OUT_M1_OK: R130.2 U14.16 | length 7.2
  Top Layer w0.2: U14.16@66.626,81.926 66.626,86.326 68.175,87.875 68.175,87.95 68.525,88.3 R130.2@68.6,88.3
STATUS_OUT_M2_ERR: R133.2 U14.13 | length 11.8
  Top Layer w0.2: U14.13@68.126,81.926 68.126,83.826 70.95,86.65 74.85,86.65 75.6,87.4 R133.2@75.6,88.3
STATUS_OUT_M2_OK: R132.2 U14.14 | length 10.7
  Top Layer w0.2: U14.14@67.626,81.926 67.626,83.926 70.7,87 73.683,87 73.8,87.117 R132.2@73.8,88.3
USBD_N: J3.A7 J3.B7 R147.2 | length 6.7
  Top Layer w0.2: R147.2@18.6,90 18.25,90.35 17.922,90.35 17.805,90.467 17.805,90.865 18.8,91.86 18.8,93.235 J3.A7@18.95,93.385 ; J3.A7@18.95,93.81 J3.A7@18.95,93.385 ; J3.B7@19.95,93.81 19.95,93.385 19.8,93.235 19.8,93.152 19.631,92.983 19.269,92.983 19.1,93.152 19.1,93.235 J3.A7@18.95,93.385
USBD_P: J3.A6 J3.B6 R146.2 | length 7
  Top Layer w0.2: R146.2@16.7,90 17.05,90.35 17.378,90.35 17.495,90.467 17.495,90.994 18.49,91.989 18.49,93.81 18.49,94.358 18.771,94.639 19.129,94.639 19.3,94.468 19.3,94.385 19.45,94.235 J3.A6@19.45,93.81
VDDA: C17.1 C18.1 L2.2 U3.13 | length 1.4
  Top Layer w0.4: U3.13@46,78.45 47.35,78.45 47.4,78.4
pads on no net: D4.2 D6.2 D7.2 D8.2 D9.2 D11.2 D12.2 D14.2 J1.8 J1.9 J2. J3. U2.4 U3.2 U3.3 U3.4 U3.24 U3.25 U3.43 U3.56 U3.57 U5.5 U5.6 U5.7 U6.5 U6.6 U6.7 U7.5 U7.6 U7.7 U8.5 U8.6 U8.7 U13.1 U16.7 U16.11 U17.7 U17.11 U18.5 U18.6 U18.7

## Polygon pours and split planes (outlines as drawn)
5V on Top Layer "5V_L01_P088" (solid, pour order 88): 18.1,96.425 17.225,95.55 17.225,93.2 21.75,93.2 21.75,89.7 23.35,89.7 23.35,93.7 21.415,93.7 21.415,96.36 20.813,96.962 18.913,96.962 18.916,96.959 18.634,96.959
OUT_M1 on Top Layer "OUT_M1_L01_P055" (solid, pour order 55): 70.8,21.5 70,20.7 65,20.7 64.2,21.5 64.2,23.837 64.2,27.7 68,31.5 68,34.8 73.5,34.8 73.5,30.5 70.8,27.8
OUT_H3 on Top Layer "OUT_H3_L01_P048" (solid, pour order 48): 62.3,21.5 61.4,20.6 56.6,20.6 55.7,21.5 55.7,24.4 55.7,27.45 55.1,28.05 55.1,34.8 60.2,34.8 60.2,28.975 62.3,26.875 62.3,23.737
OUT_L3 on Top Layer "OUT_L3_L01_P104" (solid, pour order 104): 69.3,13.5 68.9,13.9 68.9,17.4 69.3,17.8 72.1,17.8 72.5,17.4 72.5,15.3 73.1,14.7 76.6,14.7 81.7,19.8 81.7,24 87.3,29.6 87.3,34.9 90.1,34.9 90.1,30 83.2,23.1 83.2,18.8 77.9,13.5
OUT_L4 on Top Layer "OUT_L4_L01_P103" (solid, pour order 103): 73.2,14.9 72.8,15.3 72.8,16.4 72.8,17.4 73.2,17.8 75.1,17.8 76.45,17.8 79.9,21.25 79.9,25.2 84,29.3 84,34.9 84.005,34.905 87,34.905 87,30.2 81.2,24.4 81.2,19.6 76.5,14.9
OUT_M2 on Top Layer "OUT_M2_L01_P118" (solid, pour order 118): 77.55,21.5 76.75,20.7 71.75,20.7 70.95,21.5 70.95,23.837 70.95,26.975 76.4,32.425 76.4,34.8 81.5,34.8 81.5,30.45 77.55,26.5
OUT_H1 on Top Layer "OUT_H1_L01_P042" (solid, pour order 42): 48.8,21.5 47.9,20.6 43.8,20.6 39.7,20.6 38.3,22 38.3,34.8 43.9,34.8 43.9,30.95 48.8,26.05
OUT_H2 on Top Layer "OUT_H2_L01_P046" (solid, pour order 46): 55.55,21.5 54.65,20.6 49.85,20.6 48.95,21.5 48.95,26.9 46.525,29.325 46.525,34.8 52.2,34.8 52.2,30.15 55.55,26.8 55.55,23.7
5V on Top Layer "5V_L01_P116" (solid, pour order 116): 61.95,73.25 69.3,80.6 83.3,80.6 105.7,80.6 108.3,78 108.3,60.1 105.7,57.5 61.95,57.5
GND on Top Layer "GND_L01_P111" (solid, pour order 111): 94.8,54.7 32.7,54.7 32.7,41.3 33.8,40.2 92.1,40.2 94.8,42.9
OUT_L1 on Top Layer "OUT_L1_L01_P106" (solid, pour order 106): 62.025,10.375 61,11.4 61,17.4 61.4,17.8 64,17.8 64.4,17.4 64.4,12.68 65.23,11.85 80.95,11.85 90.6,21.5 90.6,24.8 95.1,24.8 95.1,21.7 94.9,21.5 93.8,21.5 82.675,10.375
OUT_L2 on Top Layer "OUT_L2_L01_P105" (solid, pour order 105): 68.7,13.9 69.1,13.5 74.4,13.5 80.1,13.5 88.3,21.7 88.3,25.2 90.8,27.7 94.9,27.7 94.9,24.8 91.4,24.8 90.6,24 90.6,21.5 80.95,11.85 65.35,11.85 64.5,12.7 64.5,17.4 64.9,17.8 68.3,17.8 68.7,17.4
GND on Top Layer "GND_L01_P101" (solid, pour order 101): 10.268,29.032 6.193,29.032 4.2,31.025 4.2,63.8 7.2,66.8 7.2,67.6 3.7,67.6 -0.1,63.8 -0.1,10.1 0.1,9.9 59.502,9.9 60.9,11.398 60.9,15 56.7,15 56.7,15.1 56.2,15.6 55.6,15 29.659,15 25.7,18.959 25.7,22.218 25.218,22.7 22.901,22.7 20.801,20.6 14.3,20.6 13.8,21.1 13.8,23.05 13.8,25.5
5V on Top Layer "5V_L01_P094" (solid, pour order 94): 10,25.3 7.9,25.3 7.3,24.7 4,24.7 4,23.2 5.8,21.4 9.3,21.4 9.3,23.128 10,23.828 10,23.9
+3V3 on Top Layer "+3V3_L01_P093" (solid, pour order 93): 12.1,24.7 12.1,23.3 9.4,23.3 9.3,23.2 9.3,21.4 13.2,21.4 14.6,22.8 14.6,24.6 12.2,24.6
GND on Top Layer "GND_L01_P084" (solid, pour order 84): 45.3,64.3 45,64 43,64 42.7,64.3 42.7,69.1 43.3,69.7 43.3,71.2 43.6,71.2 43.8,71.4 43.8,71.35 43.8,69.529 45.3,69.529
GND on Top Layer "GND_L01_P090" (solid, pour order 90): 56.5,20 56.1,20.4 53.75,20.4 53.75,17.4 55.605,17.4 56.174,16.831 56.174,11.8 60.874,11.8 60.874,17.4 60.443,17.831 57.174,17.831 56.5,18.505
+12V on Top Layer "+12V_L01_P087" (solid, pour order 87): 8.8,49.3 6.1,46.6 6.1,40.7 6.1,34.8 8.8,32.1 35.059,32.1 37.9,34.941 37.9,39 35.1,39 25.7,48.4 24.8,49.3
+12V on Top Layer "+12V_L01_P086" (solid, pour order 86): 97.425,17.9 95.825,17.9 95.1,18.625 95.1,29.9 90.1,34.9 89.5,34.9 89.5,39 90.9,39 94.8,42.9 94.8,45.4 96.9,47.5 105.2,47.5 111.6,47.5 113.5,45.6 113.5,39.5 113.5,33.6 111.4,31.5 102.6,31.5 99,27.9 99,21.8 98.1,20.9 98.1,18.575
+12V on Top Layer "+12V_L01_P085" (solid, pour order 85): 89.6,38.9 89.5,39 37.9,39 37.9,34.8 38,34.9 89.5,34.9 89.5,39
+3V3 on Top Layer "+3V3_L01_P082" (solid, pour order 82): 65.3,42.9 65.3,40.3 67.6,40.3 68.2,40.9 68.2,42.6 68.1,42.7 65.5,42.7
GND on Top Layer "GND_L01_P081" (solid, pour order 81): 43,43.2 41.7,44.5 41.7,45.3 42.2,45.8 44.6,45.8 45.1,45.3 45.1,44.5 43.8,43.2
GND on Top Layer "GND_L01_P080" (solid, pour order 80): 90.8,43.2 89.5,44.5 89.5,45.3 90,45.8 92.4,45.8 92.9,45.3 92.9,44.5 91.6,43.2
GND on Top Layer "GND_L01_P079" (solid, pour order 79): 81.7,43.2 80.4,44.5 80.4,45.3 80.9,45.8 83.3,45.8 83.8,45.3 83.8,44.5 82.5,43.2
GND on Top Layer "GND_L01_P078" (solid, pour order 78): 73.7,43.2 72.4,44.5 72.4,45.3 72.9,45.8 75.3,45.8 75.8,45.3 75.8,44.5 74.5,43.2
GND on Top Layer "GND_L01_P077" (solid, pour order 77): 62.1,43.6 62.1,39.8 64.2,39.8 65.4,41 65.4,43 66.5,43 66.5,42.8 68,42.8 68,45.5 62.4,45.5 62.1,45.8 59.7,45.8 59.2,45.3 59.2,44.5 60.5,43.2 61.3,43.2 61.7,43.6
GND on Top Layer "GND_L01_P075" (solid, pour order 75): 52.3,43.2 51,44.5 51,45.3 51.5,45.8 53.9,45.8 54.4,45.3 54.4,44.5 53.1,43.2
GND on Top Layer "GND_L01_P067" (solid, pour order 67): 28.8,73.7 28.4,73.3 28.4,71.8 28.823,71.377 34.377,71.377 35.8,72.8 34.9,73.7
+3V3 on Top Layer "+3V3_L01_P066" (solid, pour order 66): 34,68 35.8,69.8 35.8,72.8 33.5,72.8 33.1,72.4 33.1,71.3 29,71.3 27.1,69.4 22.4,69.4 22.3,69.3 20.5,69.3 20.5,67.6 22.5,67.6 23.3,66.8 25.8,66.8 26.1,67.1 26.1,68
NetD2_A on Top Layer "NETD2_A_L01_P057" (solid, pour order 57): 23.225,56.675 23.587,56.313 23.587,54.413 26,52 26,50.8 25.5,50.3 15.575,50.3 13.75,52.125 13.75,56.675
NetC2_2 on Top Layer "NETC2_2_L01_P058" (solid, pour order 58): 11,58.3 11.9,58.3 12.8,59.2 12.8,63.2 13.1,63.5 14.6,63.5 15.925,62.175 22.225,62.175 23.225,61.175 23.225,57.825 22.075,56.675 13.775,56.675 13.6,56.5 11,56.5
+12VPRT on Top Layer "+12VPRT_L01_P062" (solid, pour order 62): 12.9,51.1 13.8,52 13.8,54.8 12.3,56.3 10.8,56.3 10.8,58.2 10.7,58.3 9.9,58.3 9.9,56.3 9.4,56.3 9.4,54 8.3,54 7.7,53.4 7.7,51.6 8.2,51.1
GND on Top Layer "GND_L01_P063" (solid, pour order 63): 28.997,55.6 29.8,56.403 29.8,63.3 29,64.1 26.9,64.1 26.8,64.2 26.8,66.8 26,67.6 7.2,67.6 3.3,63.7 3.3,48.8 7.8,48.8 7.8,57.3 6.7,57.3 6.6,57.4 6.6,61.4 10.1,61.4 10,61.3 10,59.3 10.9,59.3 10.8,59.4 10.8,64.7 11.6,65.5 25.9,65.5 25.9,61.5 26.1,61.3 26.1,55.6 28,55.6
5V on Top Layer "5V_L01_P064" (solid, pour order 64): 26.1,55.438 27.962,55.438 28,55.4 28,54.1 26,54.1 25.8,53.9 25.7,54 23.7,54 23.7,60.7 21.6,62.8 15.9,62.8 15.9,64.9 16,65 24.1,65 24.7,65.6 24.7,65.7 25.85,65.7 26.1,65.45
GND on Top Layer "GND_L01_P037" (solid, pour order 37): 45.6,78.2 47.6,78.2 47.8,78 49.8,78 49.728,78.072 49.728,81.7 52,81.7 52,77.6 47.3,77.6 47.2,77.7 45.6,77.7
GND on Top Layer "GND_L01_P036" (solid, pour order 36): 47.5,82.8 47.8,83.1 47.8,87.8 47.6,88 44.6,88 44.4,87.8 44.4,83.3 44.3,83.2 43.5,83.2 43.3,83 43.3,81.1 43.8,81.1 43.8,82.8
GND on Top Layer "GND_L01_P034" (solid, pour order 34): 40.5,85.2 40.8,85.5 40.8,87.2 40.5,87.5 35.7,87.5 33.15,87.5 31,87.5 30.6,87.1 30.6,85.6 31,85.2 37.1,85.2 37.4,84.9 37.4,83.5 37.2,83.5 36.8,83.1 36.8,81 37.3,81 37.3,82.1 38.3,83.1 38.3,85.1 38.4,85.2
+3V3 on Top Layer "+3V3_L01_P031" (solid, pour order 31): 45.1,68.8 43.8,70.1 43.8,71.6 44.9,72.7 47.3,72.7 47.9,72.1 47.9,65.1 47.4,64.6 45.6,64.6 45.1,65.1
VDDA on Top Layer "VDDA_L01_P030" (solid, pour order 30): 49.6,83.8 49.85,83.55 49.85,80.75 49.85,78.55 49.45,78.15 45.65,78.15 45.65,78.65 47.65,78.65 47.95,78.95 47.95,83.35 48.4,83.8
+3V3 on Top Layer "+3V3_L01_P029" (solid, pour order 29): 42.8,82.2 41.1,83.9 41.1,87.5 41.6,88 44.2,88 44.4,87.8 44.4,84.1 43.3,83 43.3,81.1 42.8,81.1
+3V3 on Top Layer "+3V3_L01_P028" (solid, pour order 28): 31,81.4 30.6,81.8 30.6,84.7 30.9,85 37.1,85 37.2,85.1 37.4,84.9 37.4,83.5 37.2,83.5 36.8,83.1 36.8,81 36.2,81 35.8,81.4
OUT_H1 on Int1 (GND-PWR) "OUT_H1_L02_P124" (solid, pour order 124): 48.8,21.5 47.9,20.6 43.8,20.6 39.7,20.6 38.8,21.5 38.8,27.7 38.8,33.4 43.9,33.4 43.9,30.95 48.8,26.05
OUT_L1 on Int1 (GND-PWR) "OUT_L1_L02_P069" (solid, pour order 69): 61.4,11 61,11.4 61,17.4 61.4,17.8 64,17.8 64.4,17.4 64.4,12.68 64.78,12.3 81.4,12.3 90.6,21.5 90.6,24.8 93.3,24.8 93.3,21 83.3,11
OUT_L2 on Int1 (GND-PWR) "OUT_L2_L02_P070" (solid, pour order 70): 68.7,13.9 69.1,13.5 74.4,13.5 80.1,13.5 88.3,21.7 88.3,25.2 90.8,27.7 93.3,27.7 93.3,24.8 91.4,24.8 90.6,24 90.6,21.5 81.4,12.3 64.9,12.3 64.5,12.7 64.5,17.4 64.9,17.8 68.3,17.8 68.7,17.4
OUT_L3 on Int1 (GND-PWR) "OUT_L3_L02_P091" (solid, pour order 91): 69.3,13.5 68.9,13.9 68.9,17.4 69.3,17.8 72.1,17.8 72.5,17.4 72.5,15.3 73.1,14.7 76.6,14.7 81.7,19.8 81.7,24 87.2,29.5 87.2,33.4 90.1,33.4 90.1,30 83.2,23.1 83.2,18.8 77.9,13.5
OUT_L4 on Int1 (GND-PWR) "OUT_L4_L02_P119" (solid, pour order 119): 73.2,14.9 72.8,15.3 72.8,16.4 72.8,17.4 73.2,17.8 75.1,17.8 76.45,17.8 79.9,21.25 79.9,25.2 84,29.3 84,33.4 87,33.4 87,30.2 81.2,24.4 81.2,19.6 76.5,14.9
OUT_M2 on Int1 (GND-PWR) "OUT_M2_L02_P121" (solid, pour order 121): 77.55,21.5 76.75,20.7 71.75,20.7 70.95,21.5 70.95,23.837 70.95,26.975 76.4,32.425 76.4,33.4 81.5,33.4 81.5,30.45 77.55,26.5
OUT_M1 on Int1 (GND-PWR) "OUT_M1_L02_P122" (solid, pour order 122): 70.8,21.5 70,20.7 65,20.7 64.2,21.5 64.2,23.837 64.2,27.7 68.4,31.9 68.4,33.4 73.5,33.4 73.5,30.5 70.8,27.8
OUT_H3 on Int1 (GND-PWR) "OUT_H3_L02_P123" (solid, pour order 123): 62.3,21.5 61.4,20.6 56.6,20.6 55.7,21.5 55.7,24.4 55.7,27.45 55.1,28.05 55.1,33.4 60.2,33.4 60.2,28.975 62.3,26.875 62.3,23.737
OUT_H2 on Int1 (GND-PWR) "OUT_H2_L02_P125" (solid, pour order 125): 55.55,21.5 54.65,20.6 49.85,20.6 48.95,21.5 48.95,26.9 47,28.85 47,33.4 52.2,33.4 52.2,30.15 55.55,26.8 55.55,23.7
+12V on Int1 (GND-PWR) "+12V_L02_P126" (solid, pour order 126): -0.034,46.765 119.666,46.765 119.666,9.465 -0.234,9.465 -0.034,9.665
GND on Int1 (GND-PWR) "GND_L02_P127" (solid, pour order 127): -1.3,46.7 -1.3,101.6 123.8,101.6 124.1,101.3 123.7,100.9 123.7,46.7
GND on Int2 (PWR-3V3) "GND_L03_P092" (solid, pour order 92): 60.525,14.05 61.8,12.775 88.85,12.775 90.175,14.1 90.175,19.35 91.45,20.625 95.45,20.625 100.725,20.625 102.125,19.225 102.125,9.975 56.6,9.975 56.55,9.925 56.55,17.6 60.45,17.6 60.525,17.525
+3V3 on Int2 (PWR-3V3) "+3V3_L03_P129" (solid, pour order 129): -1.3,47.1 -1.3,101.6 123.8,101.6 124.1,101.3 123.7,100.9 123.7,47.1
+12V on Int2 (PWR-3V3) "+12V_L03_P120" (solid, pour order 120): 0,46.8 120,46.8 119.8,46.6 119.8,9.5 0.1,9.5 0.1,46.7
5V on Bottom Layer "5V_L04_P115" (solid, pour order 115): 26.225,96.875 25.5,97.6 22.25,97.6 19,97.6 18.75,97.35 18.75,95.025 18.95,94.825 21.025,94.825 21.325,95.125 21.325,95.5 21.525,95.7 22.275,95.7 25.8,95.7 28.325,93.175 28.325,68 24.4,68 20.35,63.95 20.35,62.25 21,61.6 25.3,61.6 30.2,66.5 30.2,92.9
+3V3 on Bottom Layer "+3V3_L04_P110" (solid, pour order 110): 35.875,45 32.35,48.525 31.919,48.525 31.187,48.525 30.025,48.525 29.725,48.225 29.725,20.425 32.575,17.575 74.025,17.575 74.025,20.775 40.375,20.775 37.6,23.55 37.6,43.9 61.1,43.9 64.9,40.1 69,40.1 72.8,43.9 95.475,43.9 98.35,46.775 98.35,48.9 97.975,49.275 95.5,49.275 95.2,48.975 95.2,45.75 94.45,45
+3V3 on Bottom Layer "+3V3_L04_P107" (solid, pour order 107): 13.425,20.125 14.6,21.3 14.6,24.3 14.3,24.6 12.4,24.6 12.1,24.3 12.1,20.125
GND on Bottom Layer "GND_L04_P112" (solid, pour order 112): 92.4,33.25 91.725,33.925 92.4,34.6 94.175,34.6 94.7,34.075 94.7,20.3 96.4,18.6 102.1,18.6 102.4,18.3 102.4,17.952 98.948,14.5 97,14.5 95.7,15.8 95.7,16.4 92.4,19.7
5V on Bottom Layer "5V_L04_P128" (solid, pour order 128): 87.7,74.8 87.7,74.2 88.1,73.8 89.2,73.8 89.6,74.2 89.6,74.8
5V on Bottom Layer "5V_L04_P117" (solid, pour order 117): 32.95,95.7 30.15,92.9 27.275,95.775 27.2,95.7 24.3,95.7 22.425,97.575 73.3,97.575 89.6,81.275 89.6,74.8 87.7,74.8 87.7,80.2 72.2,95.7
+3V3 on Bottom Layer "+3V3_L04_P114" (solid, pour order 114): 11.45,21.3 12.1,21.95 12.1,24.15 12.55,23.7 12.55,20.45 12.225,20.125 3.025,20.125 0.45,22.7 0.45,60.725 5.15,65.425 19.475,65.425 23.45,69.4 27.2,69.4 27.6,69 27.6,68.1 24.5,68.1 20.5,64.1 20.2,64.1 20.1,64 6.3,64 1.9,59.6 1.9,23.8 4.4,21.3
5V on Bottom Layer "5V_L04_P113" (solid, pour order 113): 4.2,23.2 3.525,23.875 3.525,58.475 7.3,62.25 22.15,62.25 22.8,61.6 24.6,61.6 24.8,61.8 24.8,63.8 24.6,64 6.3,64 1.9,59.6 1.9,23.8 4.3,21.4 7.6,21.4 7.6,22.9 7.3,23.2

## Silkscreen, mask and mechanical layers (free items; w line width, h text height)
Top Overlay:
  drawing of 15 lines, arcs and shapes, not listed
  text "OUTS_STATUS" at 26.85,97.817 h1
  text "H1" at 52.5,97.6 h2
  text "H2" at 57.7,97.6 h2
  text "H3" at 62.9,97.6 h2
  text "M1" at 68.1,97.6 h2
  text "M2" at 73.3,97.6 h2
  text "L1" at 78.5,97.6 h2
  text "L2" at 83.7,97.6 h2
  text "L3" at 88.9,97.6 h2
  text "L4" at 94.1,97.6 h2
  text "CAN" at 26.05,87.65 h1
  text "D1_IN" at 113.05,84.617 h1
  text "D2_IN" at 113.05,79.417 h1
  text "NR" at 13.17,75.81 h1
  text "BRD" at 56.75,75.55 h1
  text "DEVELOPMENTS" at 8.37,74.21 h1
  text "D3_IN" at 113.05,74.217 h1
  text "P3V3" at 23.65,70.35 h1 r90
  text "D4_IN" at 113.05,69.017 h1
  text "Boot0" at 35.85,57.65 h1
  text "P5V" at 29.55,49.55 h1 r90
  text "OTEMP" at 58.15,46.25 h1
  text "RCAN" at 16.15,27.05 h1 r90
  text "CAN_PDM_V1" at 100.1,10.867 h1
Bordo:
  lines w0.1: 73.2,-46.85 ccw(c78.2,-46.85) 78.2,-51.85 158.2,-51.85 ccw(c158.2,-46.85) 163.2,-46.85 163.2,63.15 ccw(c158.2,63.15) 158.2,68.15 78.2,68.15 ccw(c78.2,63.15) 73.2,63.15 73.2,-46.85

## Text inside footprints (layer, text, board x,y; h text height)
J2: Top Assembly "EDGE PCB" at 52.7,10.15 h2